# Altium PCB SAW_Ctrl.PcbDoc
Units mil, origin at the board's own origin, x right, y up, seen from the top; angles counter-clockwise.
Board outline 2760 x 1945 mil, 4 copper layers (Top Layer, GND, VCC, Bottom Layer), stack 23.756 mil thick; 24 components, 12 nets, 74 pads, 6 vias.
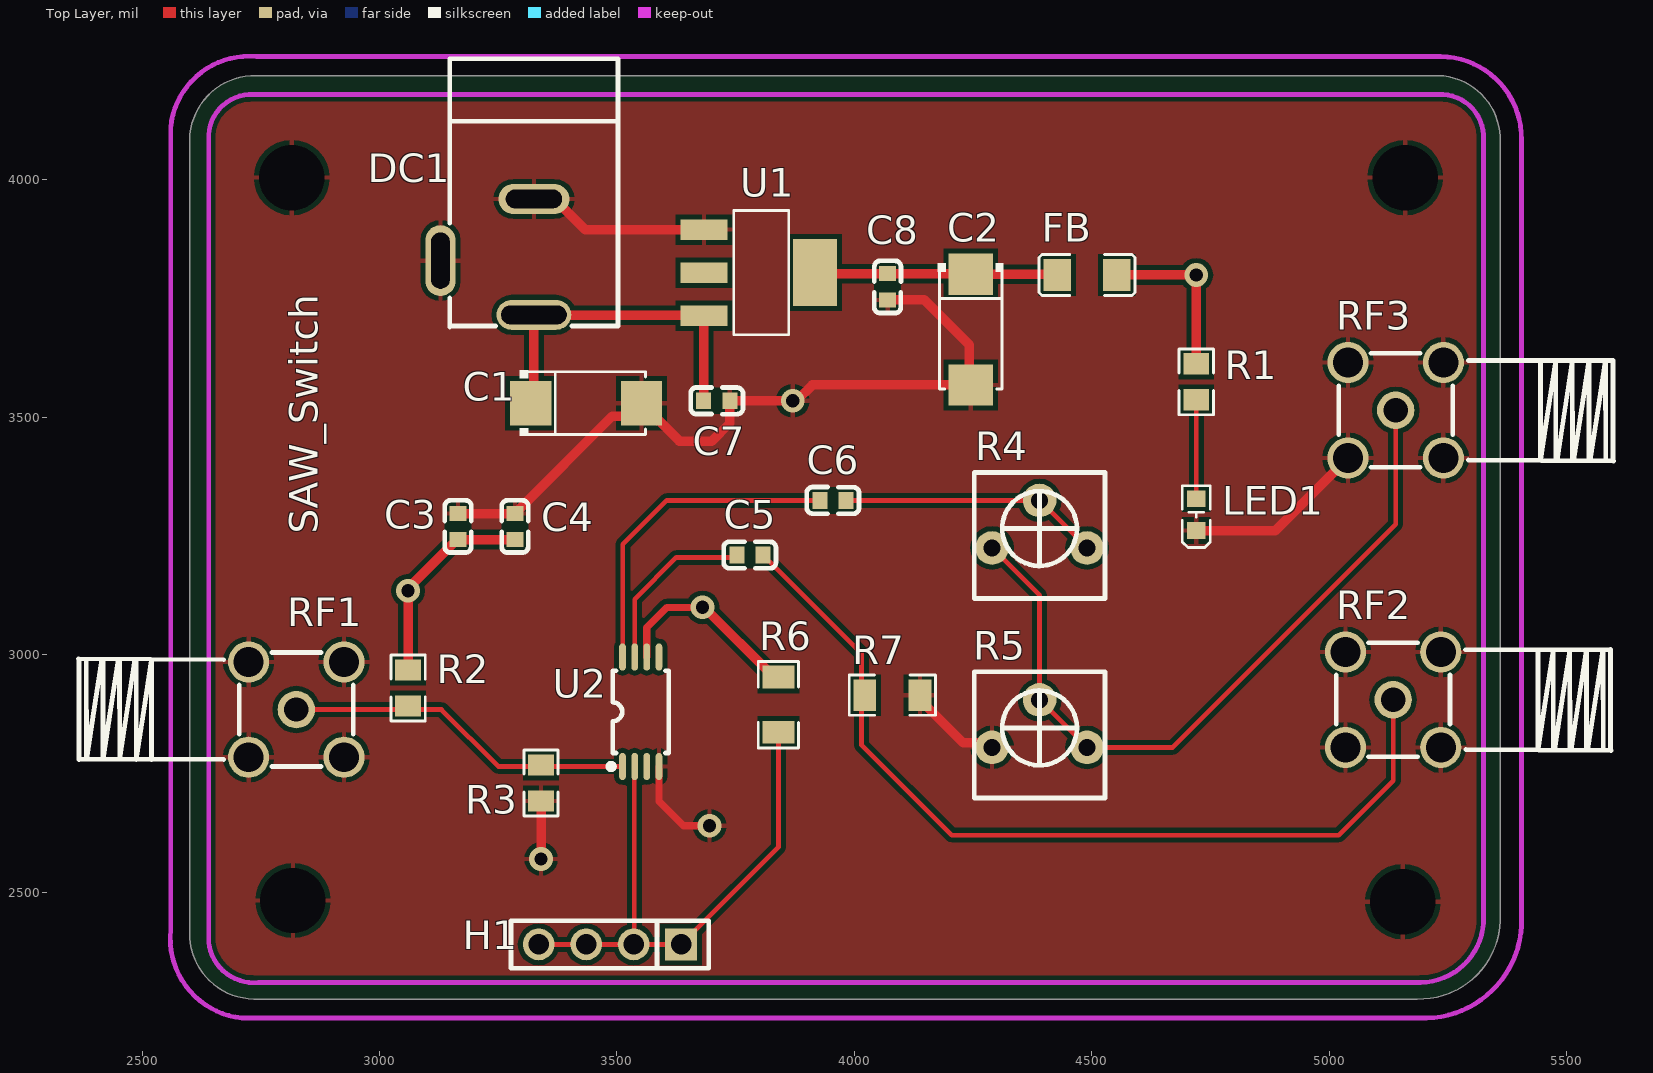
[diagram p0: Top Layer view]
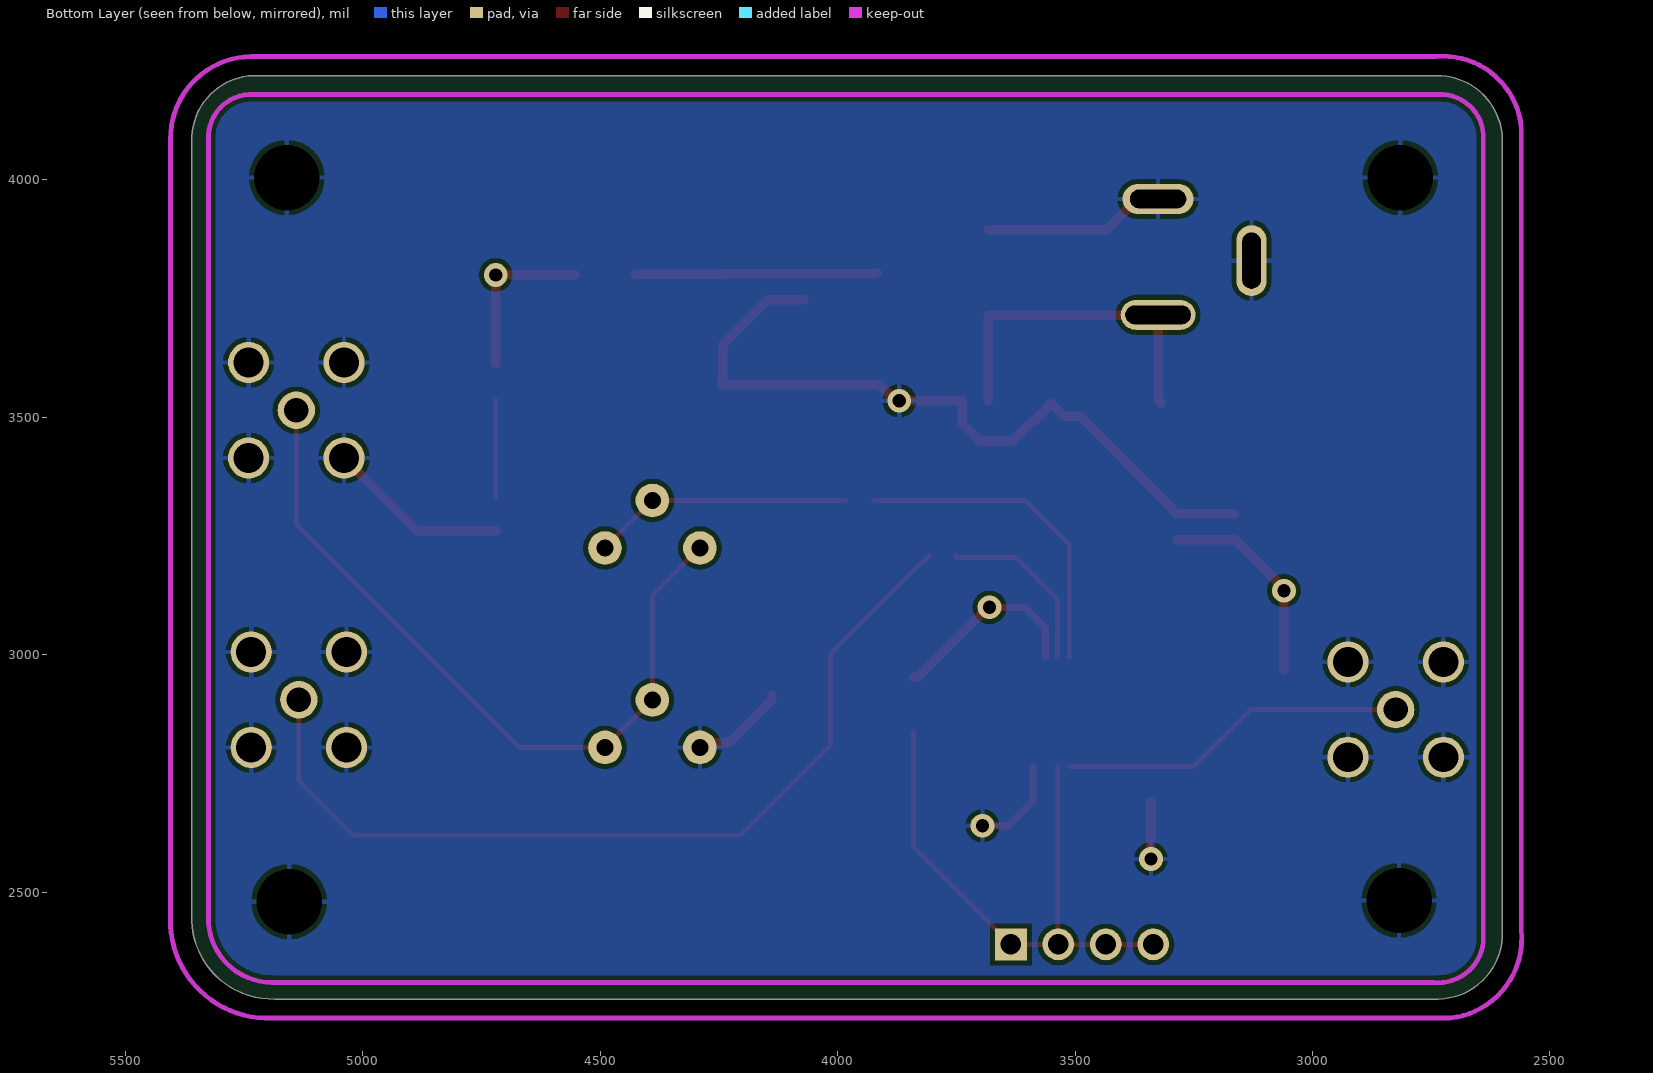
[diagram p1: Bottom Layer view, seen from below]
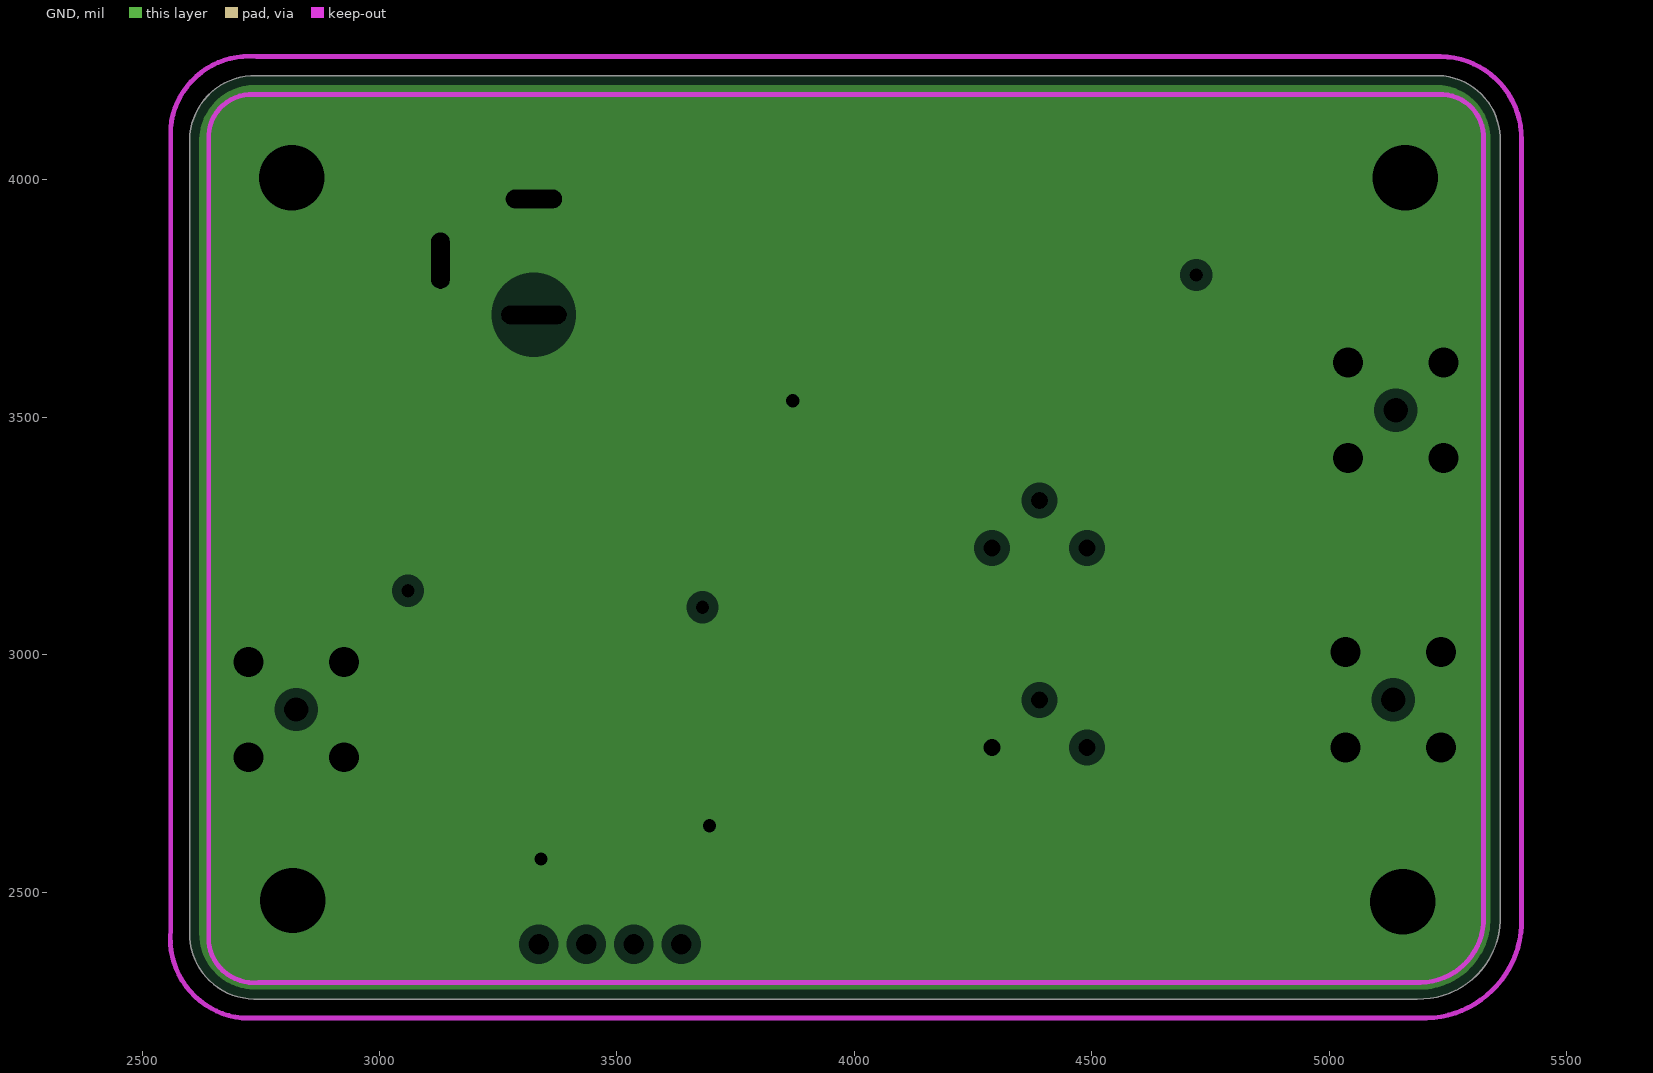
[diagram p2: GND, clearances drawn from the general rule]
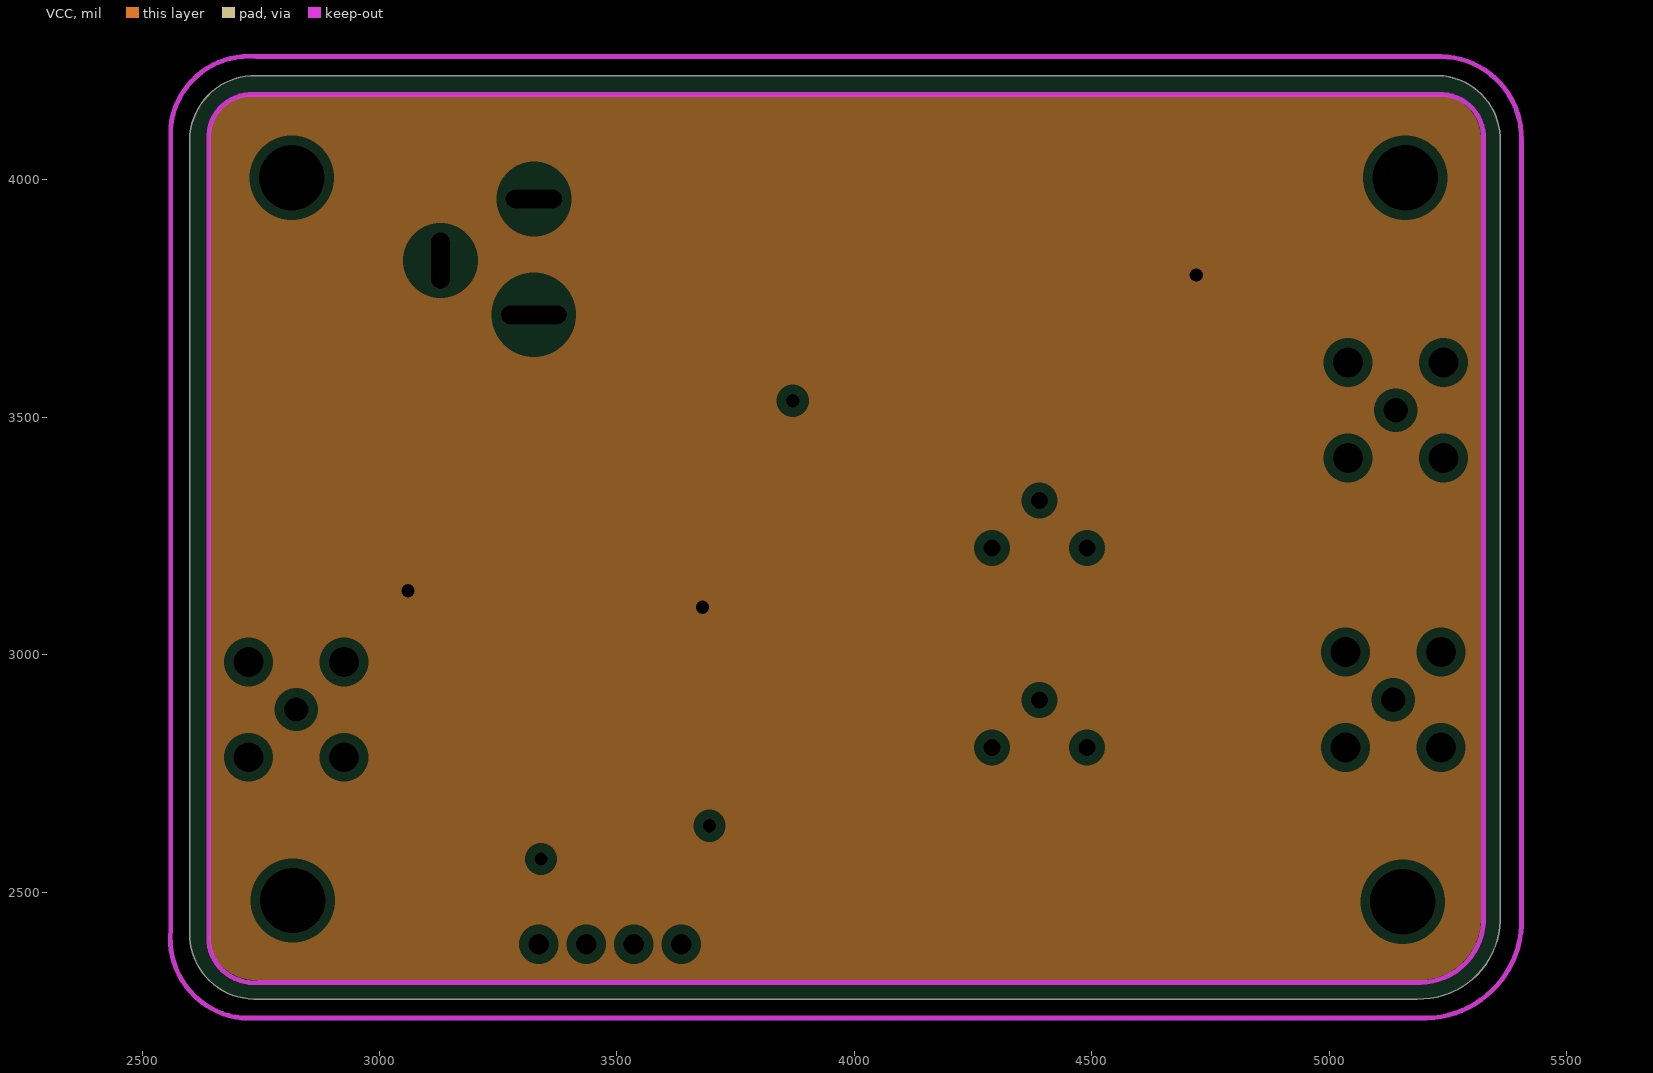
[diagram p3: VCC, clearances drawn from the general rule]

## Layer stack, top to bottom
Top Solder: solder mask 0.4, Solder Resist, Dk 3.5
Top Layer: signal copper 1.4
Dielectric 2: prepreg 2.8, PP-006, Dk 4.1
GND: plane copper 1.378, net GND
Dielectric 1: dielectric 12.6, FR-4, Dk 4.8
VCC: plane copper 1.378, net 3.3V
Dielectric 3: prepreg 2.8, PP-006, Dk 4.1
Bottom Layer: signal copper 1.4
Bottom Solder: solder mask 0.4, Solder Resist, Dk 3.5

## Board outline
2600,2415 ccw(c2737.5,2412.5) 2735,2275 5185,2275 ccw(c5190,2445) 5360,2440 5360,4080 ccw(c5225,4085) 5230,4220 2740,4220 ccw(c2737.5,4082.5) 2600,4085

## Design rules (kind name [scope] priority, off if disabled: settings)
Clearance [All] p1: gap=10 ignorepadtopadclearanceinfootprint=FALSE except(0: Arc-Hole Track-Hole SMDPad-Hole THPad-Hole Via-Hole Fill-Hole Poly-Hole Region-Hole Text-Hole)
PlaneClearance [All] p1: clearance=20
PlaneConnect [All] p1: planeconnectstyle=Relief reliefexpansion=20 reliefentries=4 reliefconductorwidth=10 reliefairgap=10
PolygonConnect [All] p1: connectstyle=Relief reliefconductorwidth=10 reliefentries=4 polygonreliefangle="90 Angle" airgapwidth=10
RoutingVias [All] p1: holewidth=28 width=50 viastyle="Through Hole" minholewidth=28 minwidth=50 maxholewidth=28 maxwidth=50
SolderMaskExpansion [All] p1: expansion=4 istentingtop=FALSE
Width Width_4 [InNet('NetC2_1')] p1: maxlimit=20 minlimit=18 preferedwidth=20 minimp=50.000000 maximp=50.000000 favimp=50.000000
Width Width_3 [InNet('NetC1_1')] p2: maxlimit=20 minlimit=18 preferedwidth=20 minimp=50.000000 maximp=50.000000 favimp=50.000000
Width Width_2 [InNet('GND')] p3: maxlimit=20 minlimit=12 preferedwidth=20 minimp=50.000000 maximp=50.000000 favimp=50.000000
Width Width_1 [InNet('3.3V')] p4: maxlimit=20 minlimit=15 preferedwidth=20 minimp=50.000000 maximp=50.000000 favimp=50.000000
Width [All] p5: maxlimit=10 minlimit=10 preferedwidth=10
28 further rules are at their usual default settings.

## Classes and differential pairs
component class SAW_Ctrl: C1 C3 C4 C5 C7 C8 DC1 FB H1 LED1 R1 R2 R3 R4 R5 R6 R7 RF1 RF2 RF3 U1 U2

## Components (designator, comment, footprint, x,y, rotation, side; value= is the part's Value field where it differs from the comment)
C1 "10uF" CAP-SMD_L6.0-W3.2-R-RD 3435,3530 r180 top
C2 "10uF" CAP-SMD_L6.0-W3.2-R-RD 4245,3685 r90 top
C3 "1uF" C0603 3165,3270 r270 top
C4 "100nF" C0603 3285,3270 r270 top
C5 "1uF" C0603 3780,3210 r0 top
C6 "1uF" C0603 3955,3325 r0 top
C7 "100nF" C0603 3710,3535 r180 top
C8 "100nF" C0603 4070,3775 r90 top
DC1 "DC-84" DC-IN-TH_DC-84 3226.57,3837.95 r180 top
FB "CBW321609U500T" L1206 4490,3800 r0 top
H1 "KH-2.54PH180-1X4P-L11.5" HDR-TH_4P-P2.54-V-M 3485,2390 r180 top
LED1 "FC-DA1608HRK-620D" LED0603-FD 4720,3295 r270 top
R1 "1K" R0805 4720,3575 r90 top
R2 "100" R0805 3060,2930 r90 top
R3 "100" R0805 3340,2730 r90 top
R4 "1K" RES-ADJ-TH_3P-L6.8-W6.8-P2.50-L_3323P 4390,3275 r0 top
R5 "1K" RES-ADJ-TH_3P-L6.8-W6.8-P2.50-L_3323P 4390,2855 r0 top
R6 "10K" R1206 3840,2895 r90 top
R7 "10K" R1206 4080,2915 r180 top
RF1 "HJ-SMA305" SMA-TH_BWSMA-KWE-Z001 2824.6,2884.61 r180 top
RF2 "HJ-SMA305" SMA-TH_BWSMA-KWE-Z001 5134.61,2905.39 r0 top
RF3 "HJ-SMA305" SMA-TH_BWSMA-KWE-Z001 5140,3515 r0 top
U1 "AMS1117-3.3" SOT-223-3_L6.5-W3.4-P2.30-LS7.0-BR 3800,3805 r180 top
U2 "CDCLVC1104PWR" TSSOP-8_L4.4-W3.0-P0.65-LS6.4-BL 3550,2880 r0 top

## Footprints (in the part's own frame and the unit in brackets; to place one, negate y for a bottom-side part, rotate by r counter-clockwise, add the part's x,y. Pads: shape width x height; smd on the part's side, far side on the other; paste and mask are expansions set on the pad)
C0603 [mm]
  rect 0.8x0.9 smd: 1(-0.7,0) 2(0.7,0)
  silkscreen extent -1.41,-0.71 1.39,0.72
CAP-SMD_L6.0-W3.2-R-RD [mil]
  rect 86.91x93.54 smd: 1(116.59,0) 2(-116.59,0)
  silkscreen extent -125,-69 140,69
DC-IN-TH_DC-84 [mm]
  oval 4x1.6 hole 1 slot 3.5 at 0 deg: 1(-2.5,3.1)
  oval 1.6x3.8 hole 1 slot 3 at 90 deg: 2(2.5,0.2)
  oval 3.8x1.6 hole 1 slot 3 at 0 deg: 3(-2.5,-3.1)
  silkscreen extent -7,-10.6 2,3.75
HDR-TH_4P-P2.54-V-M [mm]
  rect 1.7x1.7 hole 1.1: 1(-3.81,0)
  round 1.7 hole 1.1: 2(-1.27,0) 3(1.27,0) 4(3.81,0)
  silkscreen extent -5.29,-1.27 5.29,1.27
L1206 [mm]
  rect 1.485x1.728 smd: 1(-1.593,0) 2(1.593,0)
  silkscreen extent -2.56,-1.09 2.56,1.09
LED0603-FD [mm]
  rect 0.9x1 smd: 1(-0.85,0) 2(0.85,0)
  silkscreen extent -1.55,-0.75 1.75,0.75
R0805 [mil]
  rect 44.59x54.21 smd: 1(-38.04,0) 2(38.04,0)
  silkscreen extent -69,-36 69,36
R1206 [mil]
  rect 47.54x66.97 smd: 1(-58.22,0) 2(58.22,0)
  silkscreen extent -91,-42 91,42
RES-ADJ-TH_3P-L6.8-W6.8-P2.50-L_3323P [mm]
  round 1.8 hole 0.9: 1(-2.54,-1.27) 2(0,1.27) 3(2.54,-1.27)
  silkscreen extent -3.5,-3.98 3.5,2.77
SMA-TH_BWSMA-KWE-Z001 [mm]
  round 2.2 hole 1.6: 1(-2.55,-2.55) 2(-2.55,2.55) 3(2.55,2.55) 4(2.55,-2.55)
  round 2 hole 1.3: 5(0,0)
  silkscreen extent -3.05,-3.05 11.65,3.05
SOT-223-3_L6.5-W3.4-P2.30-LS7.0-BR [mm]
  rect 2.5x1.1 smd: 1(2.97,-2.3) 2(2.97,0) 3(2.97,2.3)
  rect 2.34x3.6 smd: 4(-2.97,0)
  silkscreen extent -1.57,-3.33 1.37,3.33
TSSOP-8_L4.4-W3.0-P0.65-LS6.4-BL [mm]
  oval 0.353x1.454 smd: 1(-0.975,-2.927) 2(-0.325,-2.927) 3(0.325,-2.927) 4(0.975,-2.927) 5(0.975,2.927) 6(0.325,2.927) 7(-0.325,2.927) 8(-0.975,2.927)
  silkscreen extent -1.73,-3.08 1.5,2.2

## Part data
C1 C2: library part 10uF_1, "钽电容10uF", BOM_JLCPCB Part Class="Extended Part", BOM_Manufacturer=KEMET, BOM_Manufacturer Part=T491C106K025AT, BOM_Supplier=LCSC, BOM_Supplier Part=C116748, nameAlias=Capacitance, spicePre=C, spiceSymbolName=T491C106K025AT
C3 C5 C6: "1uF电容", BOM_JLCPCB Part Class="Extended Part", BOM_Manufacturer=FH, BOM_Manufacturer Part=0603F105M160NT, BOM_Supplier=LCSC, BOM_Supplier Part=C1689, nameAlias=Capacitance, spicePre=C, spiceSymbolName=0603F105M160NT
C4 C7 C8: "100nF电容", BOM_JLCPCB Part Class="Extended Part", BOM_Manufacturer=SAMSUNG, BOM_Manufacturer Part=CL10B104KC8NNNC, BOM_Supplier=LCSC, BOM_Supplier Part=C15725, nameAlias=Capacitance, spicePre=C, spiceSymbolName=CL10B104KC8NNNC
DC1: "电源插头", BOM_Manufacturer=JINJIA(金佳), BOM_Manufacturer Part=DC-84, BOM_Supplier=LCSC, BOM_Supplier Part=C718040, Contributor=LCSC, spicePre=D, spiceSymbolName=DC-84
FB: "磁珠50", BOM_JLCPCB Part Class="Extended Part", BOM_Manufacturer="Guangdong Fenghua Advanced Tech", BOM_Manufacturer Part=CBW321609U500T, BOM_Supplier=LCSC, BOM_Supplier Part=C361673, Contributor=LCSC, spicePre=U, spiceSymbolName=CBW321609U500T
H1: "排针1*4", BOM_Manufacturer=kinghelm(金航标), BOM_Manufacturer Part=KH-2.54PH180-1X4P-L11.5, BOM_Supplier=LCSC, BOM_Supplier Part=C2905435, Contributor=LCSC, spicePre=H, spiceSymbolName=KH-2.54PH180-1X4P-L11.5
LED1: "led灯", BOM_JLCPCB Part Class="Extended Part", BOM_Manufacturer=NATIONSTAR, BOM_Manufacturer Part=FC-DA1608HRK-620D, BOM_Supplier=LCSC, BOM_Supplier Part=C84263, spicePre=L, spiceSymbolName=FC-DA1608HRK-620D
R1: "电阻1K", BOM_JLCPCB Part Class="Basic Part", BOM_Manufacturer=UniOhm, BOM_Manufacturer Part=0805W8F1001T5E, BOM_Supplier=LCSC, BOM_Supplier Part=C17513, nameAlias="Resistance (Ohms)", spicePre=R, spiceSymbolName=0805W8F1001T5E
R2 R3: "电阻100", BOM_JLCPCB Part Class="Extended Part", BOM_Manufacturer=FH, BOM_Manufacturer Part=RS-05K101JT, BOM_Supplier=LCSC, BOM_Supplier Part=C115423, Contributor=LCSC, nameAlias="Resistance (Ohms)", spicePre=R, spiceSymbolName=RS-05K101JT
R4 R5: library part 1K_1, "电位器1K", BOM_JLCPCB Part Class="Extended Part", BOM_Manufacturer="Chengdu Guosheng Tech", BOM_Manufacturer Part=3323P-1-102, BOM_Supplier=LCSC, BOM_Supplier Part=C118970, Contributor=LCSC, nameAlias="Resistance (Ohms)", Resistance(Ohms)=1K, spicePre=R, spiceSymbolName=3323P-1-102
R6 R7: "电阻10k", BOM_JLCPCB Part Class="Extended Part", BOM_Manufacturer=FH, BOM_Manufacturer Part=RS-06K1002FT, BOM_Supplier=LCSC, BOM_Supplier Part=C140407, nameAlias="Resistance (Ohms)", spicePre=R, spiceSymbolName=RS-06K1002FT
RF1 RF2 RF3: "SMA母口", BOM_JLCPCB Part Class="Extended Part", BOM_Manufacturer=皇捷, BOM_Manufacturer Part=HJ-SMA305, BOM_Supplier=LCSC, BOM_Supplier Part=C2693810, Contributor=LCSC, spicePre=R, spiceSymbolName=HJ-SMA305
U1: "降压芯片", BOM_JLCPCB Part Class="Basic Part", BOM_Manufacturer=AMS, BOM_Manufacturer Part=AMS1117-3.3, BOM_Supplier=LCSC, BOM_Supplier Part=C6186, sourceId=dwIGgezVh, spicePre=U, spiceSymbolName=AMS1117-3.3, timeStamp=1476261164
U2: "缓冲芯片", BOM_JLCPCB Part Class="Extended Part", BOM_Manufacturer="Texas Instruments", BOM_Manufacturer Part=CDCLVC1104PWR, BOM_Supplier=LCSC, BOM_Supplier Part=C485518, Contributor=LCSC, spicePre=U, spiceSymbolName=CDCLVC1104PWR

## Free pads (board coordinates)
  round 60 hole 137.8: 2(2815,4005) 3(5160,4005) 4(5155,2480) 5(2817.5,2482.5)

## Via types
v1: diameter 50, hole 28, Top Layer to Bottom Layer, 6 vias

## Nets (pads, with @x,y where several pads share a name; then routed paths per layer and width w, separated by ;. In a path a pad name is that pad's centre, name@x,y a point inside that pad or via, vN(x,y) a via of type N, cw(c..) or ccw(c..) an arc to the next point about the centre after c; other vN are vias at no path point)
3.3V: C3.2 C4.2 FB.2 R1.2 R2.2 R6.2 U2.6 | length 1211.4
  Top Layer w15: U2.6 3562.8,3057.8 3605,3100 v1(3680,3100)
  Top Layer w20: R2.2 v1(3060,3135) 3060,3139.41 3163.03,3242.45 C3.2 C4.2 ; v1(3680,3100) 3683.5,3100 3830.29,2953.22 R6.2 ; FB.2 v1(4720,3800) R1.2
GND: C1.2 C2.2 C3.1 C4.1 C7.1 C8.1 DC1.2 DC1.3 LED1.2 pad.2 pad.3 pad.4 pad.5 R3.1 R5.1 R7.1 RF1.1 RF1.2 RF1.3 RF1.4 RF2.1 RF2.2 RF2.3 RF2.4 RF3.1 RF3.2 RF3.3 RF3.4 U1.1 U2.4 | length 2875.5
  Top Layer w15: U2.4 3588.39,2691.61 3640,2640 v1(3695,2640)
  Top Layer w20: C3.1 C4.1 3286.97,3297.55 3292.72,3303.3 3292.72,3305.27 3489.85,3502.4 3523.99,3502.4 C1.2 ; DC1.3 3368.31,3960 3432.76,3895.55 U1.1 ; v1(3340,2570) R3.1 ; C1.2@3551.59,3526.68 3585.04,3493.23 3588.36,3493.23 3631.59,3450 3700,3450 3737.55,3487.55 C7.1 v1(3870,3535) 3878.12,3535 3911.53,3568.41 C2.2@4241.68,3568.41 ; C8.1 4147.56,3747.45 4241.68,3653.32 C2.2@4241.68,3568.41 ; R7.1 4138.22,2905.29 4228.77,2814.73 4280.27,2814.73 R5.1 ; C2.2 C2.2@4241.68,3568.41 ; LED1.2 4886.52,3261.53 RF3.1
NetC1_1: C1.1 C7.2 DC1.1 U1.3 | length 727
  Top Layer w20: C1.1 3325,3536.58 DC1.1 3325.73,3715.18 3682.34,3715.18 U1.3 3682.45,3713.82 C7.2
NetC2_1: C2.1 C8.2 FB.1 U1.4 | length 512.4
  Top Layer w20: U1.4 3919.38,3802.55 C8.2 4244.03,3802.55 C2.1 4425.72,3801.59 FB.1
NetC5_1: C5.1 U2.7 | length 375.6
  Top Layer w10: U2.7 3537.2,3117.2 3625,3205 3747.45,3205 C5.1
NetC5_2: C5.2 R7.2 RF2.5 | length 1904
  Top Layer w10: C5.2 3807.55,3208.03 3818.3,3197.28 3820.27,3197.28 4015,3002.55 4015,2915 4015,2810 4205,2620 4350,2620 4580,2620 5020,2620 5135,2735 5135,2905 RF2.5
NetC6_1: C6.1 U2.8 | length 687.6
  Top Layer w10: U2.8 3512.36,2995.98 3512.36,3232.36 3605,3325 C6.1@3924.13,3325
NetC6_2: C6.2 R4.2 R4.3 | length 548.9
  Top Layer w10: C6.2 R4.2 R4.3
NetH1_1: H1.1 H1.2 H1.3 H1.4 R6.1 U2.2 | length 1207.4
  Top Layer w10: H1.4 H1.3 H1.2 ; U2.2 3536.46,2764.02 3536.46,2391.46 H1.2 ; R6.1 3840,2595 H1.1 H1.2
NetLED1_1: LED1.1 R1.1 | length 208.5
  Top Layer w10: LED1.1 R1.1
NetR2_1: R2.1 R3.2 RF1.5 U2.1 | length 736.6
  Top Layer w10: RF1.5 3065,2884.61 3130.39,2884.61 3250.24,2764.76 3330,2764.76 U2.1
NetR4_1: R4.1 R5.2 R5.3 RF3.5 | length 1587.5
  Top Layer w10: R4.1 4390,3125 R5.2 R5.3 4670,2805 5140,3275 RF3.5
pads on no net: U1.2 U2.3 U2.5

## Polygon pours and split planes (outlines as drawn)
GND on Bottom Layer "bottom" (solid, remove dead copper, pour order 1): 2640,2395 2640,4095 cw(c2730,4090) 2735,4180 5240,4180 cw(c5235,4090) 5325,4085 5325,2435 cw(c5190,2445) 5180,2310 2745,2310 cw(c2735,2405)
GND on Top Layer "top" (solid, remove dead copper, pour order 0): 2640,2395 2640,4095 cw(c2730,4090) 2735,4180 5240,4180 cw(c5235,4090) 5325,4085 5325,2435 cw(c5190,2445) 5180,2310 2745,2310 cw(c2735,2405)
3.3V on VCC (split plane): 2739.27,4179.94 2739.27,4179.96 2740,4179.91 5228.87,4179.91 5233.29,4179.72 5241.51,4178.64 5249.61,4176.84 5257.52,4174.35 5265.18,4171.17 5272.54,4167.34 5279.54,4162.89 5286.12,4157.84 5292.23,4152.23 5297.84,4146.12 5302.89,4139.54 5307.34,4132.54 5311.17,4125.18 5314.35,4117.52 5316.84,4109.61 5318.64,4101.51 5319.72,4093.29 5320.08,4085 5319.93,4081.48 5320.01,4081.48 5319.91,4080 5319.91,2441.02 5319.73,2435.72 5318.73,2426.49 5317.08,2417.35 5314.79,2408.36 5311.86,2399.55 5308.3,2390.97 5304.15,2382.67 5299.41,2374.69 5294.12,2367.06 5288.29,2359.83 5281.96,2353.04 5275.17,2346.71 5267.94,2340.88 5260.31,2335.59 5252.33,2330.85 5244.03,2326.7 5235.45,2323.14 5226.64,2320.21 5217.65,2317.92 5208.51,2316.27 5199.28,2315.28 5190,2314.94 5186.18,2315.08 5186.18,2315.01 5185,2315.09 2735.18,2315.09 2729,2315.36 2720.57,2316.47 2712.26,2318.31 2704.15,2320.87 2696.29,2324.12 2688.74,2328.05 2681.57,2332.62 2674.82,2337.8 2668.55,2343.55 2662.8,2349.82 2657.62,2356.57 2653.05,2363.74 2649.12,2371.29 2645.87,2379.15 2643.31,2387.26 2641.47,2395.57 2640.36,2404 2639.98,2412.5 2640.06,2414.27 2640.04,2414.27 2640.09,2415 2640.09,4084.82 2640.36,4091 2641.47,4099.43 2643.31,4107.74 2645.87,4115.85 2649.12,4123.71 2653.05,4131.26 2657.62,4138.43 2662.8,4145.18 2668.55,4151.45 2674.82,4157.2 2681.57,4162.38 2688.74,4166.95 2696.29,4170.88 2704.15,4174.13 2712.26,4176.69 2720.57,4178.53 2729,4179.64 2737.5,4180.02
GND on GND (split plane): 2739.64,4199.93 2739.64,4199.94 2740,4199.9 5229.53,4199.9 5234.03,4199.73 5243,4198.66 5251.87,4196.9 5260.56,4194.45 5269.04,4191.32 5277.25,4187.54 5285.13,4183.12 5292.64,4178.1 5299.74,4172.51 5306.37,4166.37 5312.51,4159.74 5318.1,4152.64 5323.12,4145.13 5327.54,4137.25 5331.32,4129.04 5334.45,4120.56 5336.9,4111.87 5338.66,4103 5339.73,4094.03 5340.08,4085 5339.91,4080.74 5339.98,4080.74 5339.9,4080 5339.9,2440.35 5339.69,2434.29 5338.54,2423.64 5336.64,2413.1 5333.99,2402.72 5330.61,2392.56 5326.51,2382.66 5321.71,2373.08 5316.25,2363.87 5310.14,2355.07 5303.41,2346.73 5296.11,2338.89 5288.27,2331.59 5279.93,2324.86 5271.13,2318.75 5261.92,2313.29 5252.34,2308.49 5242.44,2304.39 5232.28,2301.01 5221.9,2298.36 5211.36,2296.46 5200.71,2295.31 5190,2294.93 5185.59,2295.09 5185.59,2295.04 5185,2295.1 2735,2295.1 2734.91,2295.09 2728.28,2295.35 2719.12,2296.43 2710.07,2298.23 2701.19,2300.74 2692.53,2303.93 2684.15,2307.79 2676.1,2312.3 2668.43,2317.43 2661.18,2323.14 2654.41,2329.41 2648.14,2336.18 2642.43,2343.43 2637.3,2351.1 2632.79,2359.15 2628.93,2367.53 2625.74,2376.19 2623.23,2385.07 2621.43,2394.12 2620.35,2403.28 2619.99,2412.5 2620.07,2414.64 2620.06,2414.64 2620.1,2415 2620.1,4085 2620.09,4085.09 2620.35,4091.72 2621.43,4100.88 2623.23,4109.93 2625.74,4118.81 2628.93,4127.47 2632.79,4135.85 2637.3,4143.9 2642.43,4151.57 2648.14,4158.82 2654.41,4165.59 2661.18,4171.86 2668.43,4177.57 2676.1,4182.7 2684.15,4187.21 2692.53,4191.07 2701.19,4194.26 2710.07,4196.77 2719.12,4198.57 2728.28,4199.65 2737.5,4200.01

## Keep-outs
Keep-Out Layer:
  lines w10: 2560,2420 ccw(c2727.5,2402.5) 2710,2235 5190,2235 ccw(c5200,2440) 5405,2430 5405,4085 ccw(c5232.5,4087.5) 5235,4260 2740,4260 ccw(c2725,4095) 2560,4110 2560,2420 ; 2640,2395 ccw(c2735,2405) 2745,2310 5180,2310 ccw(c5190,2445) 5325,2435 5325,4085 ccw(c5235,4090) 5240,4180 2735,4180 ccw(c2730,4090) 2640,4095 2640,2395

## Silkscreen, mask and mechanical layers (free items; w line width, h text height)
Top Overlay:
  text "SAW_Switch" at 2870,3255 h60 r90